# Altium PCB 枪盒主板-20201219.PcbDoc (part 2 of 2)
Units mm, origin at the board's own origin, x right, y up, seen from the top; angles counter-clockwise.
Board outline 78 x 44 mm, 2 copper layers (Top Layer, Bottom Layer); 79 components, 65 nets, 287 pads, 240 vias.
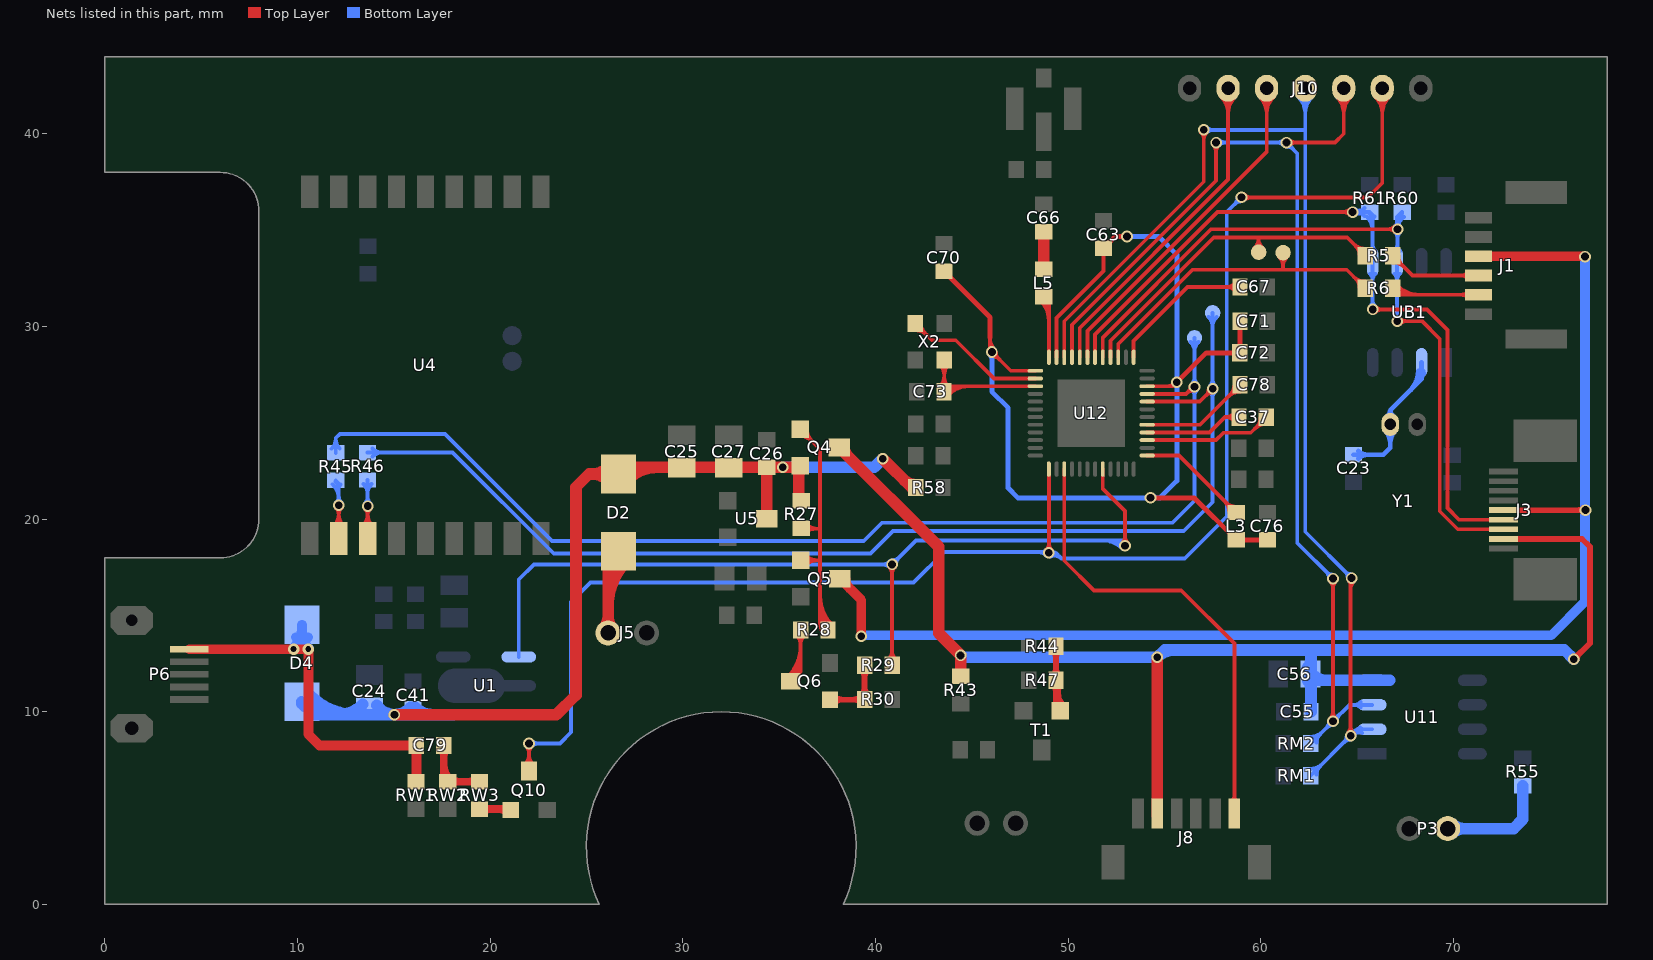
[diagram p2: the nets of this part, all layers, seen from the top]

## Via types
v1: diameter 0.6, hole 0.4, Top Layer to Bottom Layer, tented both sides, 238 vias
v2: diameter 0.6, hole 0.3, Top Layer to Bottom Layer, tented both sides, 2 vias

## Nets (pads, with @x,y where several pads share a name; then routed paths per layer and width w, separated by ;. In a path a pad name is that pad's centre, name@x,y a point inside that pad or via, vN(x,y) a via of type N, cw(c..) or ccw(c..) an arc to the next point about the centre after c; other vN are vias at no path point) (continued)
NetC23_2: C23.2 UB1.2 Y1.1 | length 12.5
  Bottom Layer w0.254: C23.2@64.82,23.343 66.37,23.343 66.725,23.699 Y1.1@66.725,24.918 66.725,25.655 ; C23.2@65.063,23.15 cw(c65.529,22.684) 65.529,23.343 cw(c65.529,24.002) C23.2@65.063,23.536 ; Y1.1@66.497,24.54 cw(c65.946,23.988) 66.725,23.988 cw(c67.505,23.988) Y1.1@66.954,24.54 ; Y1.1@66.553,25.341 ccw(c66.354,25.654) 66.725,25.654 ; Y1.1@66.898,25.341 cw(c67.096,25.654) 66.725,25.654 ; 67.77,26.699 ccw(c66.784,27.685) UB1.2@68.178,27.685 ; 68.203,27.132 ccw(c67.651,27.685) UB1.2@68.432,27.685 ; UB1.2@68.231,27.559 cw(c67.965,27.28) 68.351,27.28 ; UB1.2@68.351,28.135 68.351,27.28 ; UB1.2@68.47,27.559 ccw(c68.737,27.28) 68.351,27.28 ; 66.725,25.655 68.351,27.28
NetC37_1: C37.1 U12.28 | length 6.2
  Top Layer w0.2: U12.28@54.106,24.502 57.353,24.502 58.149,25.299 C37.1@58.877,25.299 ; C37.1@58.665,25.087 ccw(c58.152,24.575) 58.152,25.299 ccw(c58.152,26.023) C37.1@58.665,25.511
NetC37_2: C37.2 U12.27 | length 7.8
  Top Layer w0.2: U12.27@54.106,24.102 57.68,24.102 58.064,24.486 59.486,24.486 C37.2@60.299,25.299 ; 59.702,24.701 cw(c60.299,24.104) C37.2@60.299,24.949 ; 59.822,24.822 ccw(c59.396,25.249) C37.2@59.999,25.249
NetC66_1: C66.1 L5.1 | length 2
  Top Layer w0.6: L5.1@48.742,32.97 C66.1@48.742,34.926
NetC67_1: C67.1 U12.37 | length 8.7
  Top Layer w0.2: U12.37@53.406,28.402 53.406,29.252 56.21,32.055 C67.1@58.927,32.055 ; C67.1@58.715,31.843 ccw(c58.203,31.331) 58.203,32.055 ccw(c58.203,32.78) C67.1@58.715,32.267
NetC73_2: C73.2 U12.3 X2.3 | length 11.3
  Top Layer w0.2: C73.2@43.284,26.902 U12.3@48.306,26.902 ; C73.2@43.348,26.882 ccw(c42.804,27.426) 43.574,27.426 ; X2.3@43.362,27.998 cw(c42.85,27.486) 43.574,27.486 cw(c44.298,27.486) X2.3@43.786,27.998 ; C73.2@43.56,26.62 C73.2@43.574,26.633 ; 43.574,27.362 ccw(c44.252,27.362) C73.2@43.773,26.882 ; X2.3@43.574,28.261 C73.2@43.574,26.633 ; C73.2@43.631,26.599 cw(c44.363,25.867) 44.363,26.902 ; C73.2@43.773,26.458 cw(c44.846,25.384) 44.846,26.902 ; C73.2@43.792,26.851 C73.2@43.574,26.633
NetC78_1: C78.1 U12.29 | length 6.8
  Top Layer w0.2: U12.29@54.106,24.902 56.854,24.902 C78.1@58.927,26.975 ; 58.33,26.378 cw(c58.927,25.78) C78.1@58.927,26.625 ; 58.451,26.499 ccw(c58.024,26.925) C78.1@58.627,26.925
NetC79_2: C79.2 RW2.2 RW3.2 | length 6.7
  Top Layer w0.4: C79.2@17.461,8.064 cw(c17.119,7.722) 17.602,7.722 cw(c18.085,7.722) C79.2@17.744,8.064 ; 17.602,7.228 ccw(c18.608,7.228) RW2.2@17.897,6.517 ; C79.2@17.602,8.255 17.602,6.579 RW2.2@17.805,6.375 RW3.2@19.456,6.375 ; RW2.2@17.997,6.234 cw(c18.338,5.893) 18.338,6.375 cw(c18.338,6.858) RW2.2@17.997,6.517 ; RW3.2@19.265,6.234 ccw(c18.924,5.893) 18.924,6.375 ccw(c18.924,6.858) RW3.2@19.265,6.517
NetD2_1: D2.1 J5.1 | length 9.8
  Top Layer w0.6: J5.1@25.88,14.344 ccw(c25.282,14.942) 26.127,14.942 ccw(c26.972,14.942) J5.1@26.375,14.344 ; J5.1@26.127,14.097 26.127,17.803 D2.1@26.67,18.345 ; 26.127,15.486 cw(c29.429,15.486) D2.1@27.094,17.821 ; 26.127,16.935 cw(c27.98,16.935) D2.1@26.67,18.245
NetJ1_2: J1.2 R6.2 | length 8.2
  Top Layer w0.2: R6.2@66.782,31.858 ccw(c67.291,32.368) 67.291,31.648 ; R6.2@66.852,31.979 67.184,31.648 J1.2@71.297,31.648 ; R6.2@66.923,32 ccw(c67.774,32.85) 67.774,31.648 ; R6.2@67.064,32.141 ccw(c68.256,33.333) 68.256,31.648 ; J1.2@70.756,31.506 ccw(c70.414,31.165) 70.414,31.648 ccw(c70.414,32.13) J1.2@70.756,31.789
NetJ1_3: J1.3 R5.2 | length 6.8
  Top Layer w0.2: R5.2@66.852,33.331 cw(c66.852,32.486) 67.45,33.083 ; R5.2@66.852,33.681 67.886,32.648 J1.3@71.297,32.648 ; R5.2@67.152,33.631 ccw(c67.756,33.631) 67.329,33.204 ; J1.3@70.756,32.506 ccw(c70.414,32.165) 70.414,32.648 ccw(c70.414,33.13) J1.3@70.756,32.789
NetL3_1: L3.1 U12.25 | length 7
  Top Layer w0.2: U12.25@54.106,23.302 55.768,23.302 L3.1@58.724,20.346 ; 58.127,20.943 cw(c57.529,20.346) L3.1@58.374,20.346 ; 58.248,20.823 ccw(c58.674,21.249) L3.1@58.674,20.646
NetL5_2: L5.2 U12.48 | length 5.2
  Top Layer w0.2: L5.2@48.58,31.335 cw(c47.552,30.307) 49.006,30.307 ; L5.2@48.721,31.477 cw(c48.035,30.79) 49.006,30.79 ; L5.2@48.742,31.547 49.006,31.284 U12.48@49.006,28.402
NetP3_2: P3.2 R55.1 | length 7.2
  Bottom Layer w0.6: P3.2@69.706,3.938 73.126,3.938 73.609,4.42 R55.1@73.609,6.173 ; P3.2@69.954,3.69 cw(c70.551,3.093) 70.551,3.938 cw(c70.551,4.782) P3.2@69.954,4.185
NetQ4_G: Q4.G Q5.G R27.2 R28.1 | length 21.9
  Top Layer w0.2: Q4.G@36.093,24.316 cw(c36.093,23.454) 36.703,24.064 cw(c37.313,24.674) Q4.G@36.451,24.674 ; Q4.G@36.093,24.674 37.135,23.632 37.135,19.507 ; Q5.G@36.119,17.866 37.125,17.866 37.135,17.856 ; R27.2@36.144,19.533 36.17,19.507 37.135,19.507 ; Q5.G@36.371,17.614 cw(c36.981,17.004) 36.981,17.866 cw(c36.981,18.729) Q5.G@36.371,18.119 ; R27.2@36.406,19.32 cw(c36.857,18.87) 36.857,19.507 ; R27.2@36.406,19.745 ccw(c36.98,20.318) 36.98,19.507 ; 37.135,14.556 ccw(c37.798,14.556) R28.1@37.329,14.087 ; 37.135,15.039 ccw(c38.281,15.039) R28.1@37.47,14.229 ; 37.135,15.522 ccw(c38.764,15.522) R28.1@37.612,14.37 ; 37.135,16.005 ccw(c39.247,16.005) R28.1@37.753,14.512 ; R28.1@37.244,14.337 ccw(c36.865,14.386) 37.135,14.656 ; R28.1@37.445,14.583 cw(c37.348,14.869) 37.135,14.656 ; R28.1@37.541,14.249 37.135,14.656 ; 37.135,14.656 37.135,17.856 ; 37.135,17.856 37.135,19.507
NetQ6_B: Q6.B R29.1 R30.1 | length 7.5
  Top Layer w0.3: Q6.B@37.643,10.632 39.436,10.632 39.436,12.41 R29.1@39.446,12.421 ; Q6.B@37.837,10.438 cw(c38.307,9.968) 38.307,10.632 cw(c38.307,11.296) Q6.B@37.837,10.827 ; 38.818,10.632 ccw(c38.818,11.271) R30.1@39.269,10.819 ; 38.867,10.632 cw(c38.867,10.064) R30.1@39.269,10.466 ; R30.1@39.269,10.869 ccw(c38.867,11.272) 39.436,11.272 ; R29.1@39.269,12.194 cw(c38.867,11.792) 39.436,11.792 ; 39.436,11.321 ccw(c40.074,11.321) R30.1@39.623,10.869 ; 39.436,11.742 cw(c40.074,11.742) R29.1@39.623,12.194
NetQ6_C: Q6.C R28.2 | length 9.1
  Top Layer w0.2: Q6.C@35.456,11.812 ccw(c33.856,13.412) 36.119,13.412 ; Q6.C@35.597,11.671 ccw(c34.339,12.93) 36.119,12.93 ; Q6.C@35.611,11.582 36.119,12.09 R28.2@36.119,14.249 ; Q6.C@35.686,11.907 ccw(c35.686,12.511) 36.113,12.084 ; Q6.C@35.739,11.529 ccw(c34.821,12.447) 36.119,12.447 ; R28.2@35.907,13.987 cw(c35.395,13.475) 36.119,13.475 cw(c36.843,13.475) R28.2@36.331,13.987 ; Q6.C@36.001,11.662 cw(c36.437,11.772) 36.119,12.09
NetQ10_B: Q10.B RW3.1 | length 3
  Top Layer w0.4: RW3.1@19.456,4.953 21.021,4.953 Q10.B@21.072,4.902 ; RW3.1@19.648,4.812 cw(c19.989,4.47) 19.989,4.953 cw(c19.989,5.436) RW3.1@19.648,5.094 ; 20.406,4.953 cw(c20.406,4.236) Q10.B@20.913,4.743
NetR44_1: R44.1 R47.1 T1.1 | length 9
  Top Layer w0.3: R47.1@49.2,11.407 cw(c48.774,10.98) 49.377,10.98 cw(c49.981,10.98) R47.1@49.554,11.407 ; R47.1@49.2,11.86 ccw(c48.774,12.287) 49.377,12.287 ccw(c49.981,12.287) R47.1@49.554,11.86 ; R44.1@49.2,13.185 cw(c48.774,12.758) 49.377,12.758 cw(c49.981,12.758) R44.1@49.554,13.185 ; R47.1@49.252,11.367 cw(c49.069,11.05) 49.423,11.144 ; 49.377,10.592 ccw(c50.123,10.592) T1.1@49.596,10.064 ; R47.1@49.377,11.316 ccw(c50.847,11.316) T1.1@49.808,10.276 ; R44.1@49.377,13.412 R47.1@49.377,11.634 49.377,10.272 T1.1@49.591,10.059 ; 49.51,10.821 cw(c50.321,11.039) R47.1@49.594,11.459
NetR45_2: R45.2 U4.2 | length 7.5
  Top Layer w0.2: U4.2@11.898,19.647 ccw(c11.301,20.244) 12.146,20.244 ccw(c12.991,20.244) U4.2@12.393,19.647 ; v1@12.004,20.58 cw(c11.663,20.239) 12.146,20.239 cw(c12.629,20.239) v1@12.287,20.58 ; U4.2@12.146,18.999 v1(12.146,20.722)
  Bottom Layer w0.2: R45.2@11.827,21.81 cw(c11.056,21.039) 12.146,21.039 ; R45.2@11.968,21.951 cw(c11.539,21.522) 12.146,21.522 ; R45.2@11.989,22.022 12.146,21.865 v1(12.146,20.722) ; v1@12.004,20.863 ccw(c11.663,21.205) 12.146,21.205 ccw(c12.629,21.205) v1@12.287,20.863 ; 12.146,21.556 cw(c12.505,21.556) R45.2@12.251,21.81
NetR46_2: R46.2 U4.3 | length 7
  Top Layer w0.2: U4.3@13.398,19.647 ccw(c12.801,20.244) 13.646,20.244 ccw(c14.491,20.244) U4.3@13.893,19.647 ; v1@13.504,20.54 cw(c13.163,20.199) 13.646,20.199 cw(c14.129,20.199) v1@13.787,20.54 ; U4.3@13.646,18.999 v1(13.646,20.682)
  Bottom Layer w0.2: R46.2@13.429,21.82 cw(c12.905,21.296) 13.646,21.296 ; v1@13.504,20.823 ccw(c13.163,21.164) 13.646,21.164 ccw(c14.129,21.164) v1@13.787,20.823 ; R46.2@13.641,22.033 13.646,22.028 v1(13.646,20.682) ; 13.646,21.32 cw(c14.353,21.32) R46.2@13.853,21.82
NetU12_2: U12.2 X2.1 | length 8.6
  Top Layer w0.2: X2.1@42.074,29.811 cw(c42.074,28.966) 42.671,29.563 ; X2.1@42.074,30.161 42.948,29.287 44.17,29.287 46.155,27.302 U12.2@48.306,27.302 ; X2.1@42.374,30.111 ccw(c42.977,30.111) 42.551,29.684
P04/SCK: J10.3 U12.43 | length 20.9
  Top Layer w0.2: U12.43@51.006,28.402 51.006,29.759 60.311,39.064 J10.3@60.311,42.368 ; J10.3@59.958,41.914 cw(c59.104,41.061) 60.311,41.061 cw(c61.518,41.061) J10.3@60.665,41.914 ; J10.3@60.099,42.056 cw(c59.587,41.543) 60.311,41.543 cw(c61.036,41.543) J10.3@60.523,42.056
P05/MOSI: J10.2 U12.44 | length 20.2
  Top Layer w0.2: U12.44@50.606,28.402 50.606,29.924 58.311,37.63 J10.2@58.311,42.368 ; J10.2@57.958,41.914 cw(c57.104,41.061) 58.311,41.061 cw(c59.518,41.061) J10.2@58.665,41.914 ; J10.2@58.099,42.056 cw(c57.587,41.543) 58.311,41.543 cw(c59.036,41.543) J10.2@58.523,42.056
P06/MOTO1: J10.5 RM2.2 U11.3 U12.45 | length 71
  Top Layer w0.2: U12.45@50.206,28.402 50.206,30.09 57.683,37.567 v1(57.683,39.548) ; v1@57.541,39.407 cw(c57.2,39.065) 57.683,39.065 cw(c58.166,39.065) v1@57.824,39.407 ; v1(61.34,39.548) 63.855,39.548 64.311,40.005 J10.5@64.311,42.368 ; v1@61.482,39.407 cw(c61.823,39.065) 61.823,39.548 cw(c61.823,40.031) v1@61.482,39.69 ; v1@63.612,9.655 ccw(c63.271,9.997) 63.753,9.997 ccw(c64.236,9.997) v1@63.895,9.655 ; v1@63.612,16.775 cw(c63.271,16.434) 63.753,16.434 cw(c64.236,16.434) v1@63.895,16.775 ; v1(63.753,9.514) v1(63.753,16.917) ; J10.5@63.958,41.914 cw(c63.104,41.061) 64.311,41.061 cw(c65.518,41.061) J10.5@64.665,41.914 ; J10.5@64.099,42.056 cw(c63.587,41.543) 64.311,41.543 cw(c65.036,41.543) J10.5@64.523,42.056
  Bottom Layer w0.2: v1(57.683,39.548) v1(61.34,39.548) 61.899,38.99 61.899,18.771 v1(63.753,16.917) ; v1@57.824,39.407 cw(c58.166,39.065) 58.166,39.548 cw(c58.166,40.031) v1@57.824,39.69 ; v1@61.199,39.407 ccw(c60.858,39.065) 60.858,39.548 ccw(c60.858,40.031) v1@61.199,39.69 ; v1@61.34,39.348 cw(c61.34,38.865) 61.682,39.207 cw(c62.023,39.548) v1@61.54,39.548 ; RM2.2@62.596,8.356 v1(63.753,9.514) 64.603,10.363 U11.3@65.787,10.363 ; RM2.2@62.596,8.706 ccw(c62.596,9.551) 63.193,8.954 ; RM2.2@62.896,8.406 cw(c63.5,8.406) 63.073,8.833 ; v1@63.553,9.514 cw(c63.071,9.514) 63.412,9.172 cw(c63.753,8.831) v1@63.753,9.314 ; v1@63.553,16.917 ccw(c63.071,16.917) 63.412,17.258 ccw(c63.753,17.6) v1@63.753,17.117 ; v1@63.753,9.714 ccw(c63.753,10.197) 64.095,9.855 ccw(c64.436,9.514) v1@63.953,9.514 ; U11.3@65.196,10.221 ccw(c64.854,9.88) 64.854,10.363 ccw(c64.854,10.846) U11.3@65.196,10.504
P07/MOTO0: J10.4 RM1.2 U11.2 U12.46 | length 70.3
  Top Layer w0.2: U12.46@49.806,28.402 49.806,30.274 57.048,37.516 v1(57.048,40.209) ; v1@56.906,40.067 cw(c56.565,39.726) 57.048,39.726 cw(c57.531,39.726) v1@57.189,40.067 ; v1@64.526,8.905 ccw(c64.185,9.246) 64.668,9.246 ccw(c65.151,9.246) v1@64.809,8.905 ; v1@64.577,16.801 cw(c64.358,16.582) 64.668,16.582 ; v1(64.668,8.764) 64.668,16.892 v1(64.719,16.942) ; 64.668,16.337 cw(c65.324,16.337) v1@64.86,16.801
  Bottom Layer w0.2: v1(57.048,40.209) 62.311,40.209 ; v1@57.189,40.067 cw(c57.531,39.726) 57.531,40.209 cw(c57.531,40.692) v1@57.189,40.35 ; J10.4@61.958,41.914 cw(c61.104,41.061) 62.311,41.061 cw(c63.518,41.061) J10.4@62.665,41.914 ; J10.4@62.099,42.056 cw(c61.587,41.543) 62.311,41.543 cw(c63.036,41.543) J10.4@62.523,42.056 ; J10.4@62.311,42.368 62.311,40.209 ; RM1.2@62.596,6.692 v1(64.668,8.764) cw(c65.083,8.348) U11.2@65.273,8.904 ; RM1.2@62.596,7.041 ccw(c62.596,7.883) 63.192,7.287 ; RM1.2@62.896,6.741 cw(c63.502,6.741) 63.073,7.169 ; v1@64.468,8.764 cw(c63.985,8.764) 64.326,8.422 cw(c64.668,8.081) v1@64.668,8.564 ; v1@64.519,16.942 ccw(c64.036,16.942) 64.377,17.284 ccw(c64.719,17.625) v1@64.719,17.142 ; v1(64.668,8.764) 64.998,9.093 ; v1@64.673,8.963 ccw(c64.685,9.406) 64.998,9.093 ; v1(64.719,16.942) 62.311,19.35 62.311,40.209 ; v1@64.866,8.735 cw(c65.397,8.66) U11.2@65.129,9.125 ; v1@64.868,8.768 cw(c65.313,8.778) 64.998,9.093 ; 64.895,8.99 cw(c65.199,8.687) U11.2@65.337,9.093 ; U11.2@65.162,8.996 ccw(c64.998,8.905) 64.998,9.093 ; U11.2@65.162,9.19 cw(c64.998,9.28) 64.998,9.093 ; U11.2@65.787,9.093 64.998,9.093
PWR_CTL: R29.2 U1.1 U12.20 | length 52.6
  Top Layer w0.2: R29.2@40.656,12.683 ccw(c40.144,13.195) 40.869,13.195 ccw(c41.593,13.195) R29.2@41.081,12.683 ; v1@40.727,17.512 cw(c40.386,17.17) 40.869,17.17 cw(c41.351,17.17) v1@41.01,17.512 ; R29.2@40.869,12.421 v1(40.869,17.653) ; U12.20@51.806,22.602 51.806,21.575 52.958,20.422 v1(52.958,18.619) ; v1@52.817,18.76 ccw(c52.476,19.102) 52.958,19.102 ccw(c53.441,19.102) v1@53.1,18.76
  Bottom Layer w0.2: U1.1@21.487,12.854 21.487,16.866 22.274,17.653 v1(40.869,17.653) 42.114,18.898 52.679,18.898 v1(52.958,18.619) ccw(c52.284,17.944) 52.284,18.898 ; v1@40.727,17.512 ccw(c40.386,17.17) 40.386,17.653 ccw(c40.386,18.136) v1@40.727,17.794 ; v1@40.869,17.853 ccw(c40.869,18.336) 41.21,17.994 ccw(c41.551,17.653) v1@41.069,17.653 ; 51.801,18.898 cw(c51.801,17.461) v1@52.817,18.477 ; 52.767,18.898 cw(c52.767,18.427) v1@53.1,18.76
RSTN: J10.6 Q10.C U12.13 | length 90.9
  Top Layer w0.2: Q10.C@21.792,7.239 ccw(c21.237,7.794) 22.022,7.794 ccw(c22.806,7.794) Q10.C@22.252,7.239 ; v1@21.88,8.215 cw(c21.539,7.874) 22.022,7.874 cw(c22.505,7.874) v1@22.163,8.215 ; Q10.C@22.022,6.934 v1(22.022,8.357) ; v1@48.864,18.395 ccw(c48.523,18.736) 49.006,18.736 ccw(c49.489,18.736) v1@49.147,18.395 ; v1(49.006,18.253) U12.13@49.006,22.602 ; v1(59.004,36.704) 65.557,36.704 66.311,37.458 J10.6@66.311,42.368 ; v1@59.145,36.562 cw(c59.487,36.221) 59.487,36.704 cw(c59.487,37.186) v1@59.145,36.845 ; J10.6@65.958,41.914 cw(c65.104,41.061) 66.311,41.061 cw(c67.518,41.061) J10.6@66.665,41.914 ; J10.6@66.099,42.056 cw(c65.587,41.543) 66.311,41.543 cw(c67.036,41.543) J10.6@66.523,42.056
  Bottom Layer w0.2: v1(22.022,8.357) 23.622,8.357 24.206,8.941 24.206,15.697 25.222,16.713 41.986,16.713 43.577,18.304 48.956,18.304 v1(49.006,18.253) ; v1@22.163,8.215 cw(c22.505,7.874) 22.505,8.357 cw(c22.505,8.839) v1@22.163,8.498 ; 48.402,18.304 cw(c48.402,17.649) v1@48.864,18.112 ; 48.644,18.304 ccw(c48.644,18.615) v1@48.864,18.395 ; v1@49.084,18.069 cw(c49.288,17.59) 49.656,17.958 ; v1@49.177,18.149 cw(c49.361,18.037) 49.361,18.253 ; v1@49.177,18.357 ccw(c49.361,18.469) 49.361,18.253 ; 49.447,18.168 ccw(c49.163,17.884) v1(49.006,18.253) ; v1@58.804,36.704 cw(c58.321,36.704) 58.662,36.362 cw(c59.004,36.021) v1@59.004,36.504 ; v1(59.004,36.704) 58.242,35.942 58.242,20.143 56.057,17.958 49.656,17.958 ; v1(49.006,18.253) 49.361,18.253 ; 49.361,18.253 49.656,17.958
SCL: J3.3 R60.2 U12.41 UB1.6 | length 46.7
  Top Layer w0.2: U12.41@51.806,28.402 51.806,29.427 57.431,35.053 v1(67.106,35.053) ; v1@66.965,34.911 ccw(c66.623,34.57) 66.623,35.053 ccw(c66.623,35.535) v1@66.965,35.194 ; v1(67.081,30.277) 68.376,30.277 69.297,29.357 69.297,20.409 70.232,19.474 J3.3@72.6,19.474 ; v1@67.222,30.136 cw(c67.564,29.794) 67.564,30.277 cw(c67.564,30.76) v1@67.222,30.419
  Bottom Layer w0.2: v1@66.939,30.419 ccw(c66.598,30.76) 67.081,30.76 ccw(c67.564,30.76) v1@67.222,30.419 ; UB1.6@66.939,32.743 cw(c66.598,32.402) 67.081,32.402 cw(c67.564,32.402) UB1.6@67.222,32.743 ; UB1.6@66.939,33.926 ccw(c66.537,34.329) 67.106,34.329 ; v1@66.965,34.911 cw(c66.623,34.57) 67.106,34.57 cw(c67.589,34.57) v1@67.248,34.911 ; v1@66.965,35.194 ccw(c66.685,35.474) 67.081,35.474 ; v1@67.044,35.243 ccw(c66.981,35.434) 67.176,35.382 ccw(c67.338,35.338) v1@67.232,35.208 ; v1(67.081,30.277) UB1.6@67.081,33.335 67.106,33.36 v1(67.106,35.053) ; v1@67.081,35.028 cw(c67.849,35.028) R60.2@67.447,35.683 ; v1@67.081,35.053 67.081,35.679 R60.2@67.34,35.938 ; 67.081,35.386 cw(c67.629,35.386) R60.2@67.342,35.853 ; R60.2@67.081,35.597 ccw(c67.65,35.597) v1@67.248,35.194 ; 67.106,34.206 ccw(c67.502,34.206) UB1.6@67.222,33.926
SDA: J3.4 R61.2 U12.42 UB1.5 | length 48.4
  Top Layer w0.2: U12.42@51.406,28.402 51.406,29.593 57.754,35.942 v1(64.769,35.942) ; v1@64.628,35.8 ccw(c64.287,35.459) 64.287,35.942 ccw(c64.287,36.424) v1@64.628,36.083 ; v1(65.811,30.887) 68.63,30.887 69.697,29.82 69.697,20.575 70.298,19.973 J3.4@72.6,19.973 ; v1@65.952,30.745 cw(c66.294,30.404) 66.294,30.887 cw(c66.294,31.37) v1@65.952,31.028
  Bottom Layer w0.2: v1(64.769,35.942) 65.655,35.942 R61.2@65.658,35.938 65.811,35.786 UB1.5@65.811,33.335 v1(65.811,30.887) ; v1@64.877,35.942 cw(c64.877,35.206) R61.2@65.396,35.726 ; v1@64.892,35.942 ccw(c64.892,36.655) R61.2@65.396,36.15 ; v1@64.898,35.789 cw(c65.112,35.536) 65.198,35.855 ; v1@64.902,36.092 ccw(c65.113,36.332) 65.196,36.023 ; v1@64.911,35.8 cw(c65.252,35.459) 65.252,35.942 cw(c65.252,36.424) v1@64.911,36.083 ; v1@64.943,35.842 cw(c65.267,35.654) 65.17,36.016 ; v1@64.943,36.042 ccw(c65.279,36.236) 65.178,35.861 ; R61.2@65.496,35.726 cw(c64.737,34.967) 65.811,34.967 ; R61.2@65.638,35.868 cw(c65.22,35.45) 65.811,35.45 ; v1@65.669,31.028 ccw(c65.328,31.37) 65.811,31.37 ccw(c66.294,31.37) v1@65.952,31.028 ; UB1.5@65.669,32.743 cw(c65.328,32.402) 65.811,32.402 cw(c66.294,32.402) UB1.5@65.952,32.743 ; UB1.5@65.669,33.926 ccw(c65.328,34.267) 65.811,34.267 ccw(c66.294,34.267) UB1.5@65.952,33.926 ; 65.811,35.461 cw(c66.186,35.461) R61.2@65.921,35.726
SETKEY: J8.1 U12.15 | length 25.1
  Top Layer w0.2: U12.15@49.806,22.602 49.806,17.841 51.34,16.307 55.879,16.307 58.633,13.553 J8.1@58.633,4.616 ; J8.1@58.492,5.334 ccw(c58.151,5.675) 58.633,5.675 ccw(c59.116,5.675) J8.1@58.775,5.334
U35_RD1: pad.7 R6.1 U12.39 | length 18.7
  Top Layer w0.2: U12.39@52.606,28.402 52.606,29.096 56.454,32.944 61.163,32.944 ; pad.7@60.951,33.621 cw(c60.438,33.109) 61.163,33.109 cw(c61.887,33.109) pad.7@61.375,33.621 ; pad.7@61.163,33.833 61.163,32.944 ; 64.832,32.577 ccw(c65.43,33.174) R6.1@65.43,32.329 ; 64.953,32.456 cw(c64.526,32.029) R6.1@65.13,32.029 ; R6.1@65.43,31.979 64.465,32.944 61.163,32.944
U35_RX2: pad.10 R46.1 U12.32 | length 65.2
  Top Layer w0.2: U12.32@54.106,26.102 56.835,26.102 v1(57.505,26.772) ; v1@57.305,26.772 cw(c56.822,26.772) 57.164,26.431 cw(c57.505,26.089) v1@57.505,26.572
  Bottom Layer w0.2: R46.1@13.641,23.455 18.06,23.455 23.303,18.212 39.751,18.212 40.919,19.38 56.006,19.38 57.505,20.879 v1(57.505,26.772) pad.10@57.505,30.709 ; R46.1@13.903,23.243 cw(c14.415,22.731) 14.415,23.455 cw(c14.415,24.179) R46.1@13.903,23.667 ; pad.10@57.293,30.497 cw(c56.781,29.985) 57.505,29.985 cw(c58.229,29.985) pad.10@57.717,30.497 ; v1@57.364,26.631 cw(c57.022,26.289) 57.505,26.289 cw(c57.988,26.289) v1@57.647,26.631 ; v1@57.364,26.914 ccw(c57.022,27.255) 57.505,27.255 ccw(c57.988,27.255) v1@57.647,26.914
U35_TD1: pad.6 R5.1 U12.40 | length 19.7
  Top Layer w0.2: U12.40@52.206,28.402 52.206,29.262 57.565,34.621 59.893,34.621 ; pad.6@59.681,34.071 ccw(c59.168,34.583) 59.893,34.583 ccw(c60.617,34.583) pad.6@60.105,34.071 ; pad.6@59.893,33.859 59.893,34.621 ; 64.832,34.278 ccw(c65.43,34.876) R5.1@65.43,34.031 ; 64.953,34.158 cw(c64.526,33.731) R5.1@65.13,33.731 ; R5.1@65.43,33.681 64.49,34.621 59.893,34.621
U35_TX2: pad.9 R45.1 U12.33 | length 64.2
  Top Layer w0.2: U12.33@54.106,26.502 56.117,26.502 ; 56.278,26.662 ccw(c56.066,26.874) v1@56.365,26.874 ; v1@56.557,26.674 ccw(c56.533,26.086) 56.118,26.502 ; v1(56.565,26.874) 56.489,26.874 56.117,26.502
  Bottom Layer w0.2: R45.1@11.777,23.656 ccw(c11.265,24.168) 11.989,24.168 ccw(c12.713,24.168) R45.1@12.201,23.656 ; R45.1@11.989,23.444 11.989,24.206 12.204,24.422 17.659,24.422 23.208,18.873 39.395,18.873 40.335,19.813 55.422,19.813 56.565,20.956 v1(56.565,26.874) pad.9@56.565,29.414 ; pad.9@56.353,29.202 cw(c55.841,28.689) 56.565,28.689 cw(c57.29,28.689) pad.9@56.777,29.202 ; v1@56.424,26.732 cw(c56.082,26.391) 56.565,26.391 cw(c57.048,26.391) v1@56.707,26.732 ; v1@56.424,27.015 ccw(c56.082,27.357) 56.565,27.357 ccw(c57.048,27.357) v1@56.707,27.015
V6V: C55.1 C56.1 J3.2 J8.5 Q4.D R43.2 U11.4 | length 76.9
  Top Layer w0.3: J3.2@72.6,18.974 76.683,18.974 77.088,18.568 77.088,13.564 v1(76.25,12.726) ; v1@76.25,12.876 ccw(c76.25,13.238) 76.506,12.982 ; v1@76.4,12.726 cw(c76.762,12.726) 76.506,12.982
  Top Layer w0.6: Q4.D@38.125,23.724 43.282,18.567 43.282,14.072 v1(44.424,12.929) R43.2@44.424,11.837 ; Q4.D@38.375,23.724 ccw(c38.979,23.724) Q4.D@38.552,23.297 ; J8.5@54.634,4.616 v1(54.634,12.826)
  Bottom Layer w0.6: v1@44.424,12.828 v1(54.634,12.826) ; 55.557,13.209 ccw(c55.557,11.903) v1(54.634,12.826) v1(54.634,12.826) ; C56.1@62.438,11.614 cw(c62.022,11.197) 62.61,11.197 ; C56.1@62.438,12.314 ccw(c62.022,12.731) 62.61,12.731 ; C56.1@62.585,11.964 C56.1@62.61,11.939 ; C55.1@62.61,10.008 C56.1@62.61,11.939 ; C56.1@62.732,11.908 ccw(c63.394,12.569) 63.394,11.634 ; 66.7,11.634 62.915,11.634 C56.1@62.61,11.939 ; v1(76.25,12.726) 75.768,13.209 62.636,13.209 ; v1(54.634,12.826) 55.016,13.209 62.636,13.209 ; C56.1@62.61,11.939 62.61,13.183 62.636,13.209
VBAT: C24.1 C25.1 C26.1 C27.1 C41.1 D2.2 D4.2 Q4.S R27.1 R58.1 U1.4 U5.3 | length 69.4
  Top Layer w0.6: v1(15.037,9.854) 23.443,9.854 24.46,10.871 24.46,21.666 25.139,22.345 D2.2@26.67,22.345 27.019,22.695 C26.1@34.366,22.695 ; D2.2@26.246,21.921 ccw(c25.221,20.897) 25.221,22.345 ccw(c25.221,23.794) D2.2@26.246,22.77 ; D2.2@27.094,22.021 cw(c28.721,20.395) 28.721,22.695 ; 29.188,22.695 cw(c29.188,22.106) C25.1@29.605,22.522 ; C25.1@30.305,22.522 cw(c30.722,22.106) 30.722,22.695 ; 31.618,22.695 cw(c31.618,22.106) C27.1@32.034,22.522 ; C27.1@32.735,22.522 cw(c33.151,22.106) 33.151,22.695 ; U5.3@34.366,20.015 C26.1@34.366,22.695 ; 35.524,22.695 ccw(c35.524,23.343) Q4.S@35.982,22.885 ; R27.1@36.015,21.085 36.015,22.695 v1(35.19,22.695) C26.1@34.366,22.695 ; 36.015,21.389 ccw(c36.528,21.389) R27.1@36.165,21.026 ; 36.015,22.204 cw(c36.663,22.204) Q4.S@36.205,22.662 ; v1(40.386,23.139) 41.884,21.641 R58.1@42.087,21.641 ; 41.484,22.041 ccw(c42.087,22.644) R58.1@42.087,21.791
  Bottom Layer w0.6: D4.2@10.236,10.422 ccw(c11.608,11.794) 11.608,9.854 ; D4.2@10.236,10.522 10.905,9.854 v1(15.037,9.854) ; D4.2@10.66,10.846 ccw(c13.057,13.243) C24.1@13.057,9.854 ; 12.113,9.854 ccw(c12.113,11.662) C24.1@13.391,10.383 ; C24.1@14.119,10.35 ccw(c15.037,10.951) v1(15.037,9.854) ; C41.1@15.878,10.227 cw(c15.037,10.988) v1(15.037,9.854) ; C41.1@16.123,10.231 ccw(c17.033,11.141) 17.033,9.854 ; U1.4@18.087,9.854 v1(15.037,9.854) ; v1(35.19,22.695) 39.941,22.695 v1(40.386,23.139)
VBUS: C79.1 D4.1 P6.1 RW1.1 | length 24.3
  Top Layer w0.5: P6.1@4.394,13.25 v2@10.575,13.25 ; v2(10.566,13.259) v2@10.575,13.25 ; RW1.1@16.154,6.375 16.18,6.401 C79.1@16.18,8.255 11.151,8.255 10.575,8.83 v2@10.575,13.25 ; 16.18,6.797 ccw(c16.626,6.797) RW1.1@16.31,6.481
  Bottom Layer w0.5: v2@9.769,13.294 ccw(c8.641,14.422) D4.1@10.236,14.422 ; v2(9.804,13.259) v2(10.566,13.259) ; D4.1@9.906,13.862 cw(c9.565,13.284) 10.236,13.284 cw(c10.907,13.284) D4.1@10.566,13.862 ; 10.236,13.284 D4.1@10.236,14.522 ; D4.1@10.236,14.177 ccw(c11.484,14.177) v2@10.602,13.294
VCC: C63.2 C70.2 C71.2 C72.2 C76.2 L3.2 U12.1 U12.34 U12.47 | length 63.8
  Top Layer w0.2: 45.949,29.405 ccw(c46.778,29.405) v1@46.192,28.818 ; 45.949,29.439 45.949,28.778 47.025,27.702 U12.1@48.306,27.702 ; v1@46.05,28.477 cw(c46.05,27.994) 46.392,28.335 cw(c46.733,28.677) v1@46.25,28.677 ; U12.47@49.406,28.402 49.406,30.44 51.841,32.875 C63.2@51.841,34.062 ; U12.34@54.106,26.902 v1@55.451,26.902 ; 55.168,26.902 ccw(c55.168,27.586) v1(55.651,27.102)
  Top Layer w0.254: C70.2@43.56,32.868 45.949,30.48 45.949,29.439 ; C63.2@51.841,34.062 52.45,34.672 v1(53.06,34.672) ; v1(54.279,21.108) 56.54,21.108 L3.2@58.724,18.924 C76.2@60.35,18.924 ; v1(55.651,27.102) 57.184,28.636 C72.2@58.913,28.636 58.927,28.65 C71.2@58.927,30.277
  Bottom Layer w0.254: v1@45.928,28.554 cw(c45.633,28.259) 46.05,28.259 cw(c46.468,28.259) v1@46.173,28.554 ; v1(46.05,28.677) 46.05,26.619 46.888,25.782 46.888,21.616 47.396,21.108 v1(54.279,21.108) ; v1(53.06,34.672) 54.711,34.672 55.651,33.732 v1(55.651,27.102) 55.651,21.991 54.768,21.108 ; v1@54.402,21.23 ccw(c54.697,21.526) 54.697,21.108
VDD3V3: J1.4 J3.5 Q5.D | length 70.6
  Top Layer w0.29: J3.5@72.6,20.472 v1(76.86,20.472) ; v1@76.751,20.363 ccw(c76.486,20.098) 76.486,20.472 ccw(c76.486,20.847) v1@76.751,20.582
  Top Layer w0.5: Q5.D@38.151,16.916 39.268,15.799 v1(39.268,13.919) ; Q5.D@38.451,16.916 ccw(c39.175,16.916) 38.663,16.404 ; J1.4@71.297,33.648 v1@76.842,33.648
  Bottom Layer w0.5: v1(39.268,13.919) 39.32,13.971 75.082,13.971 76.834,15.723 76.834,18.517 v1(76.834,33.63)
pads on no net: J1.A J1.B J3.10 J3.11 J8.7 J8.8 P6.2 P6.3 P6.4 P6.6 P6.7 U1.3 U4.6 U4.7 U4.8 U4.9 U4.10 U4.11 U4.12 U4.13 U4.17 U11. U11.1 U12.14 U12.22 U12.35 U12.36 U12.38 UB1. UB1.3 UB1.7 Y1.3
copper on no net: | length 19
  Top Layer w0.5: 21.004,19.541 ccw(c20.663,19.882) 21.146,19.882 ccw(c21.629,19.882) 21.287,19.541 ; 21.004,36.458 cw(c20.663,36.116) 21.146,36.116 cw(c21.629,36.116) 21.287,36.458 ; 21.146,18.999 v1(21.146,27.661) ; v1(21.146,29.972) 21.146,36.999
  Bottom Layer w0.5: 20.986,28.002 cw(c20.702,27.661) v1(21.146,27.661) ; 21.146,28.194 v1(21.146,27.661) ; 21.146,29.527 v1(21.146,29.972) ; 21.306,28.002 ccw(c21.59,27.661) v1(21.146,27.661)

## Polygon pours and split planes (outlines as drawn)
GND on Top Layer "Top Layer-No Net" (solid, remove dead copper, pour order 4): 0,0 0,44 78,44 78,0
GND on Bottom Layer "Top Layer-No Net" (solid, remove dead copper, pour order 3): 0,0 0,44 78,44 78,0

## Keep-outs
Keep-Out Layer:
  circle w0.127: c12,4 r1.25
  circle w0.127: c12,41 r1.25
  circle w0.127: c75,41 r1.25
  circle w0.127: c32,33 r7
  circle w0.127: c12,4 r1.25
  circle w0.127: c12,41 r1.25
  circle w0.127: c75,41 r1.25
  lines w0.127: 0,0 25.675,0 cw(c32,3) 38.325,0 78,0 78,44 0,44
  lines w0.15: 0,0 0,18 6,18 ccw(c6,20) 8,20 8,36 ccw(c6,36) 6,38 0,38 0,44

## Other copper
Top Layer:
  pour cut-out: 48.082,27.814 49.529,27.814 49.758,28.042 49.758,42.52 49.606,42.673 47.853,42.673 47.65,42.469 47.65,28.245
  region net NetL5_2: 48.31,31.928 48.31,28.372 48.615,28.068 49.098,28.068 49.098,31.547
Bottom Layer:
  pour cut-out: 48.539,27.814 49.529,27.814 49.758,28.042 49.758,42.52 49.606,42.673 47.853,42.673 47.65,42.469 47.65,28.703

## Silkscreen, mask and mechanical layers (free items; w line width, h text height)
Top Overlay:
  text "JYD-QH" at 18.796,41.91 h1.27
  text "M3V3" at 55.244,40.666 h1
  text "GND" at 67.386,40.59 h1
  text "2020-12-19" at 18.466,40.03 h1.27
  text "RX1" at 60.172,34.367 h1 r90
  text "TX1" at 61.493,34.367 h1 r90
Bottom Overlay:
  text "TX2" at 59.842,30.354 h1
  text "WIFI_RX" at 20.447,29.185 h1
  text "RX2" at 59.004,29.084 h1
  text "WIFI_TX" at 20.422,27.762 h1
Mechanical 3:
  lines w0.127: 25.156,3.677 25.156,4.677